# EAGLE board HL78xx-STM32U5 -V3 (EAGLE 9.5.2), part 1 of 2
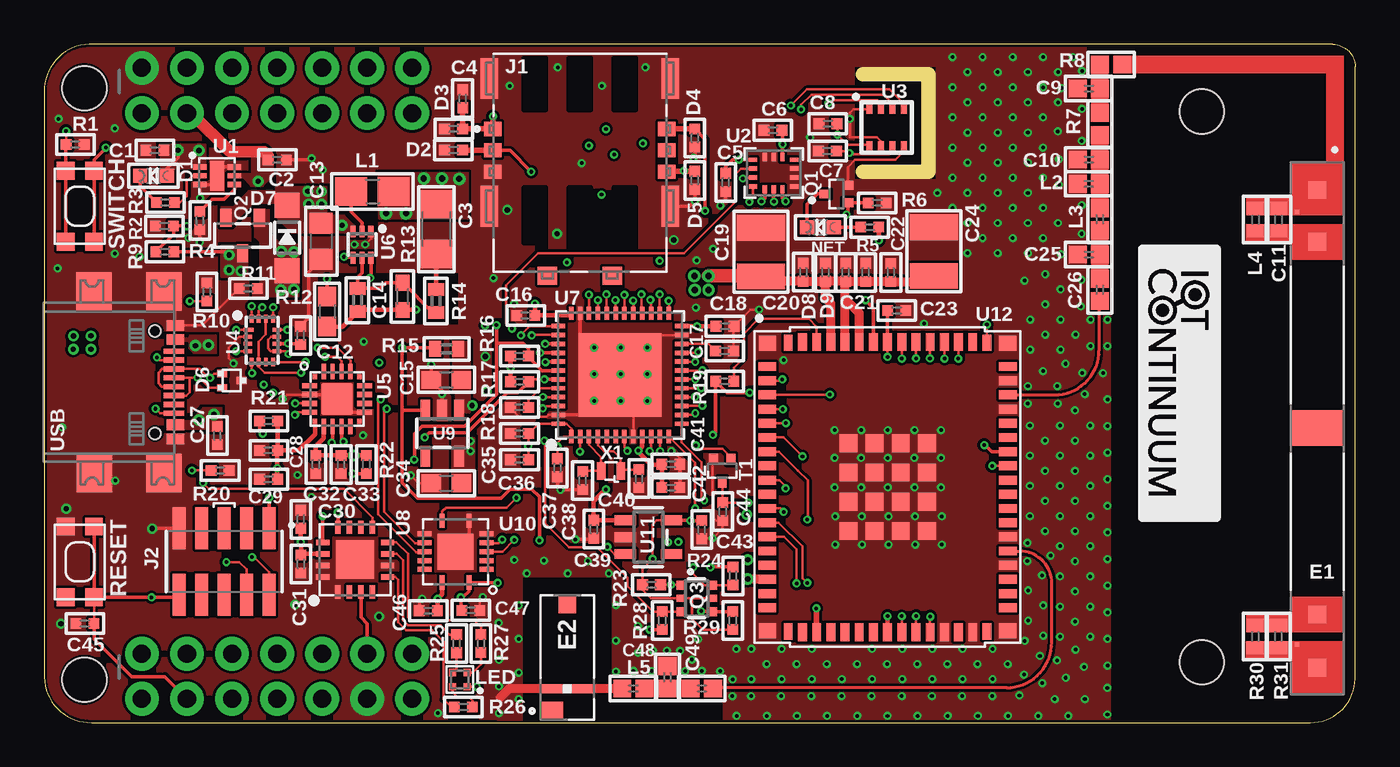
[diagram p0: board, top side]
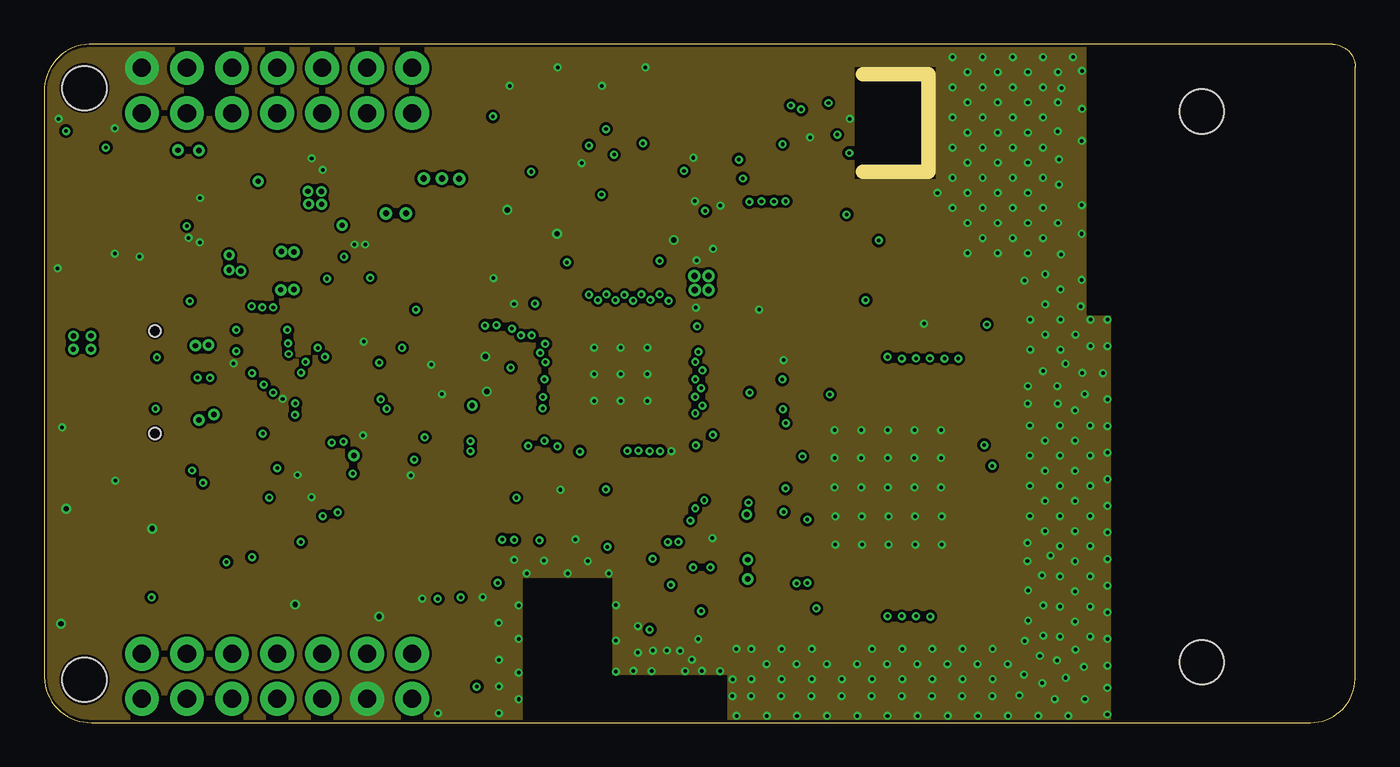
[diagram p1: board, inner layer GND1]
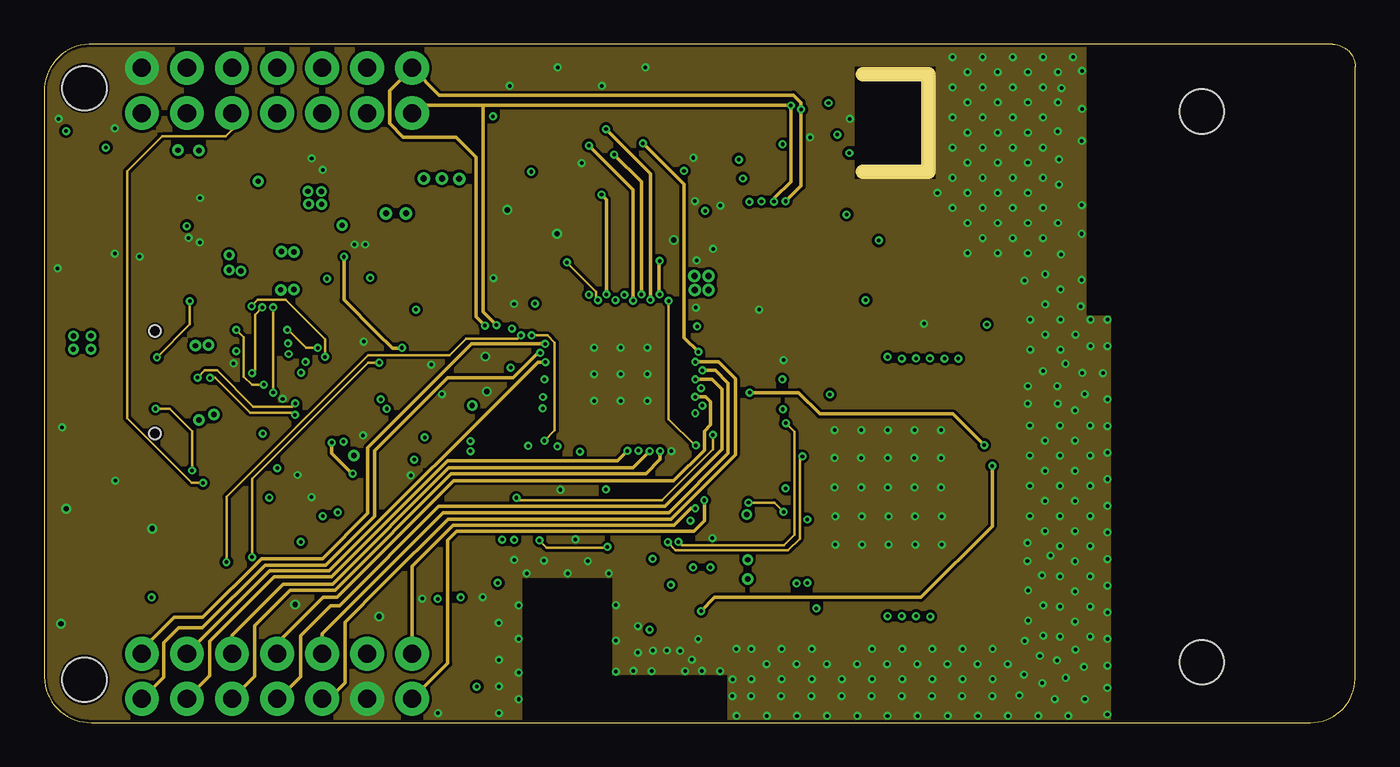
[diagram p2: board, inner layer SIG/GND2]
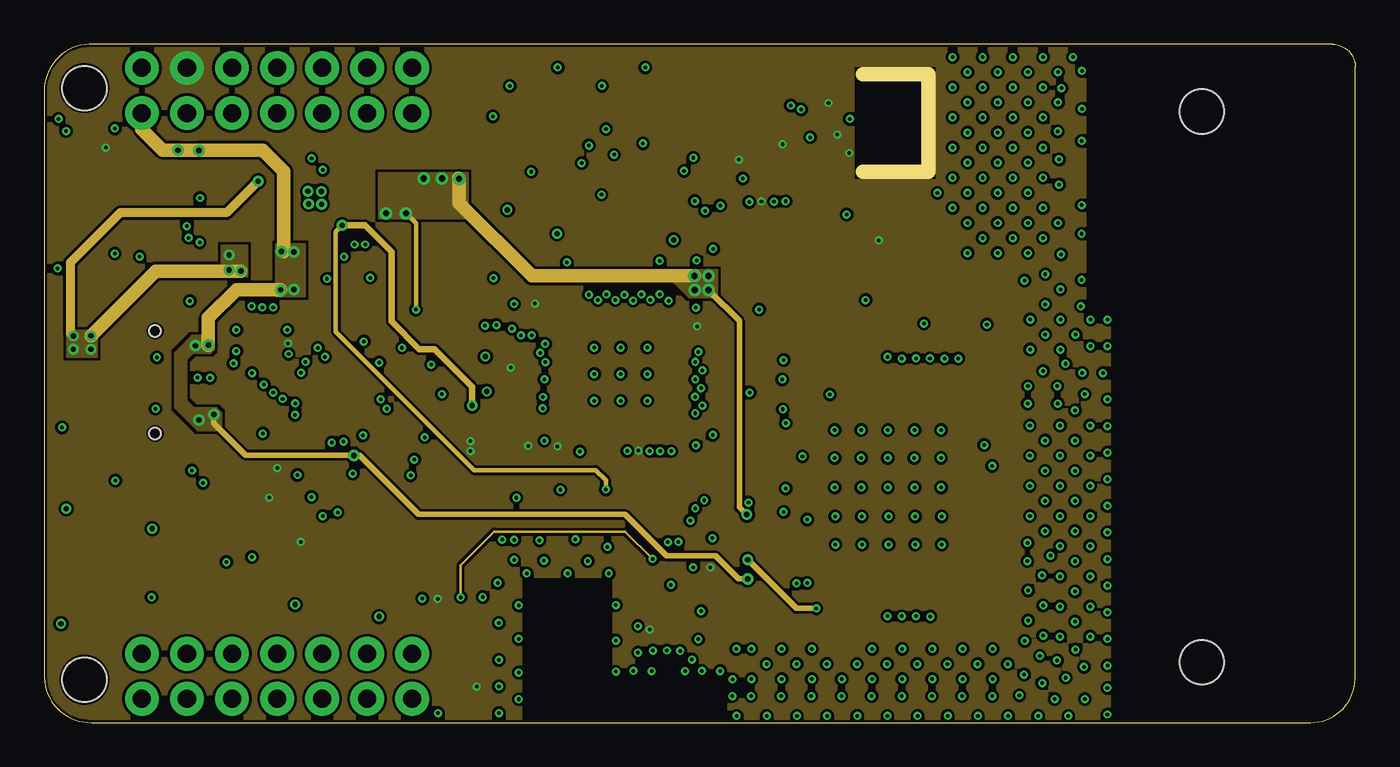
[diagram p3: board, inner layer PWR]
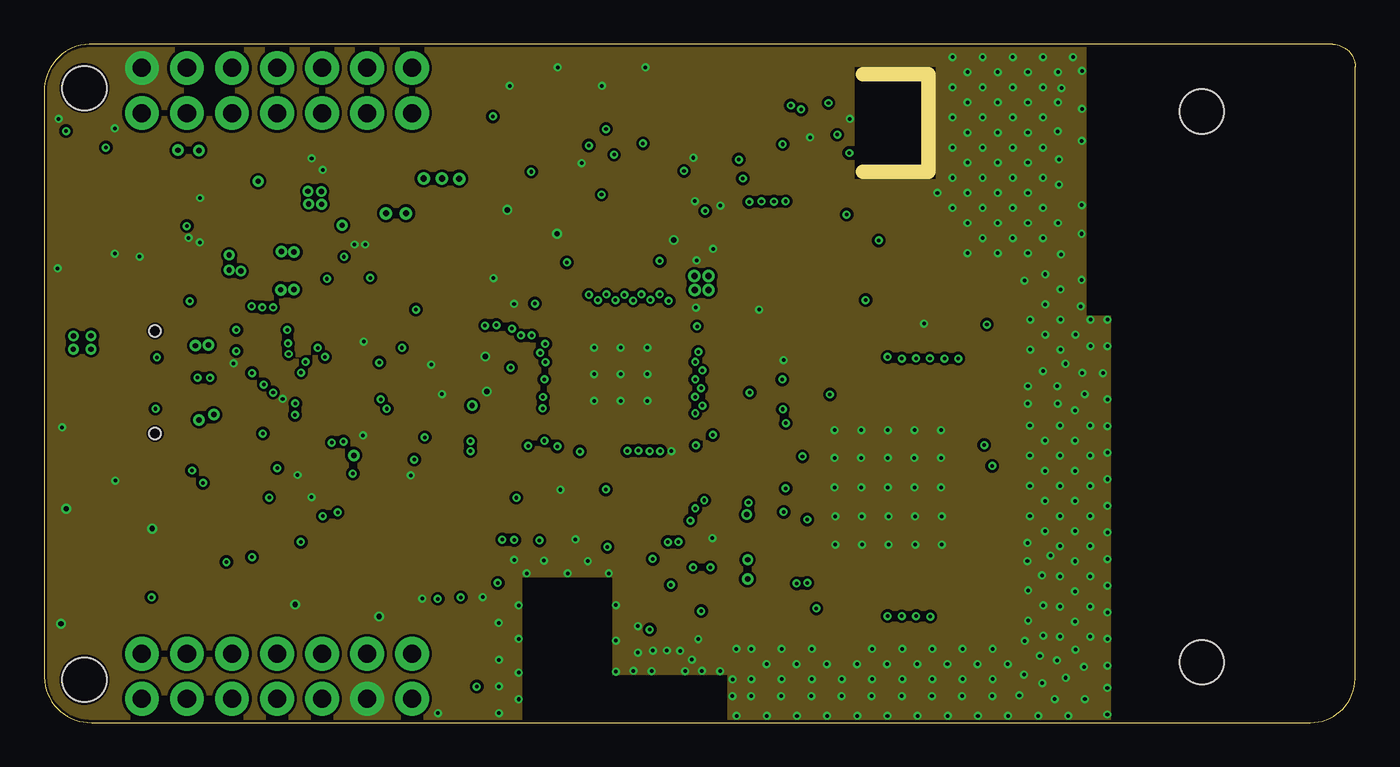
[diagram p4: board, inner layer GND3]
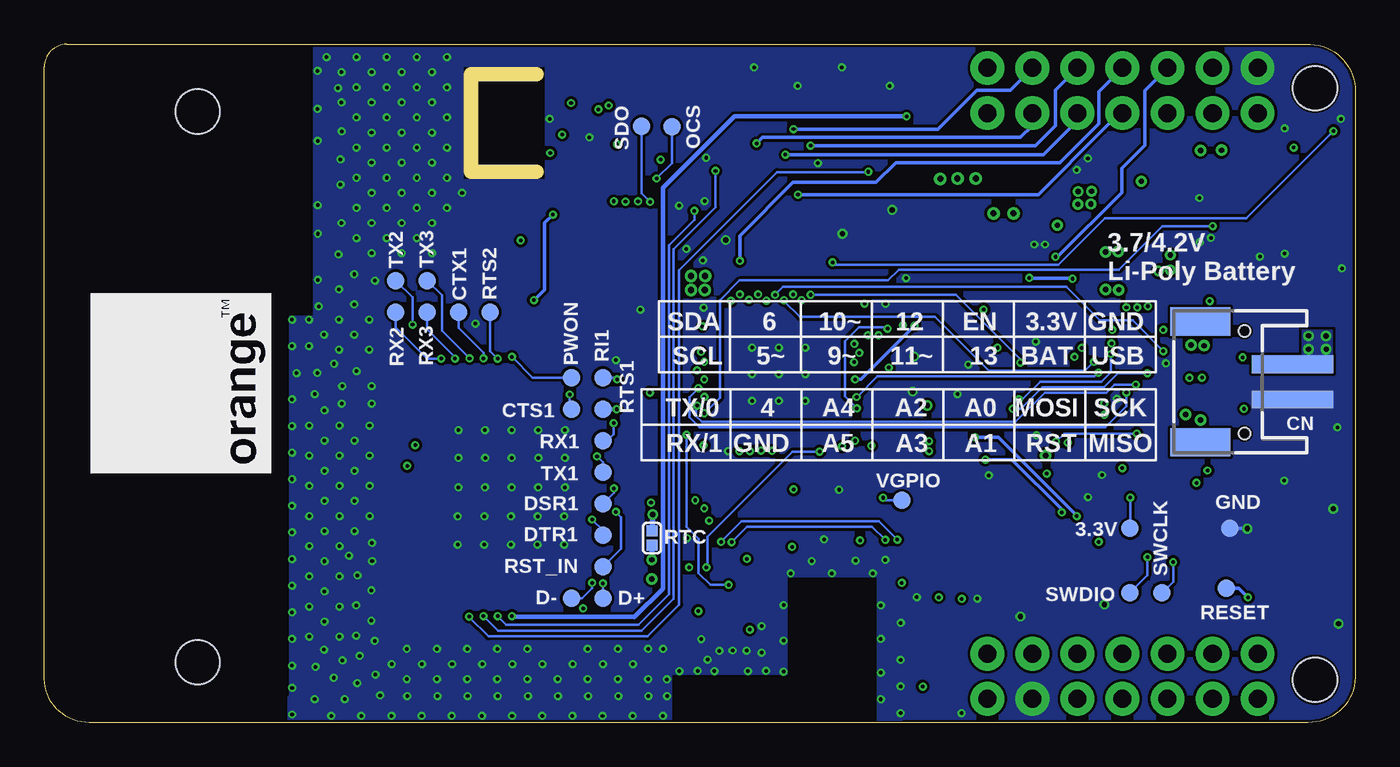
[diagram p5: board, bottom side, seen from below]

Size 73.91 x 38.23 mm. Coordinates in mm from the lower left corner, seen from the top.
Outline: 73.91,36.96 73.91,2.46 arc-90 71.37,0 2.67,0 arc-90 0,2.54 0,35.56 arc-90 2.54,38.23 72.66,38.23
Outline: 72.66,38.23 arc-90 73.91,36.96
Outline: 72.66,38.23 arc-90 73.91,36.96
Copper layers (1+2*3+14*15+16): Top 0.035559375mm / dielectric 0.17018125mm / GND1 0.01778125mm / dielectric 47mil / SIG/GND2 0.0356mm / dielectric 0.2007mm / PWR 0.0356mm / dielectric 0.1499mm / GND3 0.01778125mm / dielectric 0.17018125mm / Bottom 0.035559375mm
Design rules "jlcpcb-6-layer": minimum track width 5mil, minimum drill 0.2mm, track to track 0.126490625mm, track to pad 0.126490625mm, pad to pad 0.126490625mm, via to via 0.126490625mm, smd to smd 0mil, copper to edge 0.1mm, drill to drill 5mil, minimum pad ring 4mil, minimum via ring 4mil, stop-mask expansion 3mil, vias tented up to drill 100mil, thermal gap 10mil
Net classes: 1 highpower: width 0.305 mm, drill 0.483 mm; 2 lowpower: width 0.254 mm, drill 0.483 mm
Holes 2.5 mm at 2.27,2.41 65.27,3.4 2.27,35.76 65.27,34.44
Milling: 3 lines

## Footprints (pad centres in the part's own frame; a part is rotated, then mirrored left to right if it is on the bottom)
TP-1P0 = smd 1 x 1: TP 0,0
KMR2 = smd 1 x 1: 1 2,0.8; 2 2,-0.8; 3 -2,0.8; 4 -2,-0.8
_0402 = smd 0.6 x 0.6: 1 -0.508,0; 2 0.508,0
1206 = smd 1.6 x 1.8: 1 -1.4,0; 2 1.4,0
C_1MMX1MM-IGNION = smd 1 x 1: 1 -0.625,0; 2 0.625,0
C_1MMX0.75MM-IGNION = smd 0.75 x 1: 1 -0.625,0; 2 0.625,0
_0805 = smd 1.2 x 1.3: 1 -1.016,0; 2 1.016,0
0402 = smd 0.7 x 0.9: 1 -0.65,0; 2 0.65,0
0603 = smd 1.1 x 1: 1 -0.85,0; 2 0.85,0
1210-C = smd 2.7 x 1.45: 1 0,1.4; 2 0,-1.35
JSTPH2 = smd 1 x 4.6: 1 -1,-3.7; 2 1,-3.7 | smd 1.6 x 3.4: NC1 -3.4,1.5; NC2 3.4,1.5
CHIPLED_0603 = smd 0.8 x 0.8: A 0,-0.75; C 0,0.75
_0402_ESD = smd 0.6 x 0.6: 1 -0.508,0; 2 0.508,0
SOT723 = smd 0.6 x 0.4: 1 -0.55,0.4; 2 -0.55,-0.4; 3 0.55,0
SOD-123 = smd 1.4 x 1.4: A 1.85,0; C -1.85,0
XDCR_FR01-S4-210 = smd 2 x 3: NC 0,0 | smd 0.254 x 0.254: P1_1 -12.192,-1.143; P2_2 12.192,-1.143 | smd 1 x 1: P1_2 -10.5,0; P2_1 10.5,0; PORT1 -13.424,0; PORT2 13.5,0
XCVR_NN03-320 = smd 1 x 1: 1 -3,0 | smd 0.5 x 1.25: 2 1.75,-0.875; 4 1.75,0.875 | smd 1 x 1.25: 3 3,-0.875
2X7-HEADER = drill 1.016 pad 1.905: 1 0,0; 2 0,-2.54; 3 2.54,0; 4 2.54,-2.54; 5 5.08,0; 6 5.08,-2.54; 7 7.62,0; 8 7.62,-2.54; 9 10.16,0; 10 10.16,-2.54; 11 12.7,0; 12 12.7,-2.54; 13 15.24,0; 14 15.24,-2.54
CONNECTORS_MOLEX_104224-0820 = smd 1 x 2.3: G1 -5.1,1.5; G2 -5.1,8.7; G3 5.1,8.7; G4 5.1,1.5 | smd 1.1 x 1: R1 -1.82,12.625; R2 1.82,12.625 | smd 1 x 0.8: S1 4.9,4.35; S2 4.9,5.55; S3 -4.9,4.35; S4 4.9,6.75; S5 -4.9,5.55; S6 -4.9,6.75
SAMTEC_FTSH-105-XX-X-DV = smd 0.74 x 2.38: 1 -2.54,-1.88; 2 -2.54,1.88; 3 -1.27,-1.88; 4 -1.27,1.88; 5 0,-1.88; 6 0,1.88; 7 1.27,-1.88; 8 1.27,1.88; 9 2.54,-1.88; 10 2.54,1.88
0806-IND = smd 1.8 x 1.6: 1 -1.2,0; 2 1.2,0
L_1MMX1MM-IGNION = smd 1 x 1: 1 -0.625,0; 2 0.625,0
L_1MMX0.75MM-IGNION = smd 0.75 x 1: 1 -0.625,0; 2 0.625,0
LED-WURTH-150044M155260 = smd 0.4 x 0.4: 1 -0.4,-0.4; 2 -0.4,0.4; 3 0.4,0.4; 4 0.4,-0.4
SC-75/SOT-416 = smd 0.5 x 0.6: P1 -0.5,0; P2 0.5,0; P3 0,1.295
SOT23-3 = smd 0.635 x 1.016: 1 -0.95,-1; 2 0.95,-1; 3 0,1
SOT363 = smd 0.5 x 0.5: 1 -0.75,-0.9; 3 0.75,-0.9; 4 0.75,0.9; 6 -0.75,0.9 | smd 0.4 x 0.5: 2 0,-0.9; 5 0,0.9
0402-R = smd 0.6 x 0.6: 1 -0.508,0; 2 0.508,0
R_1MMX1MM-IGNION = smd 1 x 1: 1 -0.625,0; 2 0.625,0
_0603-R = smd 0.9 x 0.8: 1 -0.762,0; 2 0.762,0
R_1MMX0.75MM-IGNION = smd 0.75 x 1: 1 -0.625,0; 2 0.625,0
SMT-JUMPER_2_NC_PASTE_SILK = smd 0.635 x 0.635: 1 -0.406,0; 2 0.406,0
MLPD-UT62X2 = smd 0.75 x 0.3: 1 -0.975,0.5; 2 -0.975,0; 3 -0.975,-0.5; 4 0.975,-0.5; 5 0.975,0; 6 0.975,0.5 | smd 0.8 x 1.7: THERMAL 0,0
LGA-14L = smd 0.475 x 0.25: 1 -1.163,0.75; 2 -1.163,0.25; 3 -1.163,-0.25; 4 -1.163,-0.75; 8 1.163,-0.75; 9 1.163,-0.25; 10 1.163,0.25; 11 1.163,0.75 | smd 0.25 x 0.475: 5 -0.5,-0.912; 6 0,-0.912; 7 0.5,-0.912; 12 0.5,0.912; 13 0,0.912; 14 -0.5,0.912
BME280_LGA = smd 0.5 x 0.35: 1 1.025,0.975; 2 1.025,0.325; 3 1.025,-0.325; 4 1.025,-0.975; 5 -1.025,-0.975; 6 -1.025,-0.325; 7 -1.025,0.325; 8 -1.025,0.975
QFN-16L = smd 0.562 x 0.225: 1 -0.769,0.6 | smd 0.463 x 0.225: 2 -0.819,0.2; 3 -0.819,-0.2; 4 -0.819,-0.6; 9 0.819,-0.6; 10 0.819,-0.2; 11 0.819,0.2; 12 0.819,0.6 | smd 0.225 x 0.463: 5 -0.6,-1.218; 6 -0.2,-1.218; 7 0.2,-1.218; 8 0.6,-1.218; 13 0.6,1.218; 14 0.2,1.218; 15 -0.2,1.218; 16 -0.6,1.218
QFN20 = smd 0.3 x 0.3: 1 -1.25,1.25; 6 -1.25,-1.25; 11 1.25,-1.25; 16 1.25,1.25 | smd 0.9 x 0.3: 2 -1.55,0.75; 3 -1.55,0.25; 4 -1.55,-0.25; 5 -1.55,-0.75; 12 1.55,-0.75; 13 1.55,-0.25; 14 1.55,0.25; 15 1.55,0.75 | smd 0.3 x 0.9: 7 -0.75,-1.55; 8 -0.25,-1.55; 9 0.25,-1.55; 10 0.75,-1.55; 17 0.75,1.55; 18 0.25,1.55; 19 -0.25,1.55; 20 -0.75,1.55 | smd 1.8 x 1.8: TP 0,0
SOT-563 = smd 0.67 x 0.3: 1 -0.74,0.5; 2 -0.74,0; 3 -0.74,-0.5; 4 0.74,-0.5; 5 0.74,0; 6 0.74,0.5
TQFN48_7MM = smd 0.25 x 0.75: 1 -2.75,-3.475; 2 -2.25,-3.475; 3 -1.75,-3.475; 4 -1.25,-3.475; 5 -0.75,-3.475; 6 -0.25,-3.475; 7 0.25,-3.475; 8 0.75,-3.475; 9 1.25,-3.475; 10 1.75,-3.475; 11 2.25,-3.475; 12 2.75,-3.475; 25 2.75,3.475; 26 2.25,3.475; 27 1.75,3.475; 28 1.25,3.475; 29 0.75,3.475; 30 0.25,3.475; 31 -0.25,3.475; 32 -0.75,3.475; 33 -1.25,3.475; 34 -1.75,3.475; 35 -2.25,3.475; 36 -2.75,3.475 | smd 0.75 x 0.25: 13 3.475,-2.75; 14 3.475,-2.25; 15 3.475,-1.75; 16 3.475,-1.25; 17 3.475,-0.75; 18 3.475,-0.25; 19 3.475,0.25; 20 3.475,0.75; 21 3.475,1.25; 22 3.475,1.75; 23 3.475,2.25; 24 3.475,2.75; 37 -3.475,2.75; 38 -3.475,2.25; 39 -3.475,1.75; 40 -3.475,1.25; 41 -3.475,0.75; 42 -3.475,0.25; 43 -3.475,-0.25; 44 -3.475,-0.75; 45 -3.475,-1.25; 46 -3.475,-1.75; 47 -3.475,-2.25; 48 -3.475,-2.75 | smd 4.7 x 4.7: THERMAL 0,0
QFN16-4X4MM = smd 0.75 x 0.305: 1 -1.825,0.975; 2 -1.825,0.325; 3 -1.825,-0.325; 4 -1.825,-0.975; 9 1.825,-0.975; 10 1.825,-0.325; 11 1.825,0.325; 12 1.825,0.975 | smd 0.305 x 0.75: 5 -0.975,-1.825; 6 -0.325,-1.825; 7 0.325,-1.825; 8 0.975,-1.825; 13 0.975,1.825; 14 0.325,1.825; 15 -0.325,1.825; 16 -0.975,1.825 | smd 2.16 x 2.16: T 0,0
SOT23-5@1 = smd 0.55 x 1.2: 1 -0.95,-1.3; 2 0,-1.3; 3 0.95,-1.3; 4 0.95,1.3; 5 -0.95,1.3
PVQFN-N14 = smd 0.28 x 0.8: 1 -0.75,1.74; 7 -0.75,-1.74; 8 0.75,-1.74; 14 0.75,1.74 | smd 0.8 x 0.28: 2 -1.75,1; 3 -1.75,0.5; 4 -1.75,0; 5 -1.75,-0.5; 6 -1.75,-1; 9 1.75,-1; 10 1.75,-0.5; 11 1.75,0; 12 1.75,0.5; 13 1.75,1 | smd 2.05 x 2.05: GND 0,0
SOT23-5 = smd 1.2 x 0.55: 1 -1.3,0.95; 2 -1.3,0; 3 -1.3,-0.95; 4 1.3,-0.95; 5 1.3,0.95
HL781X = smd 0.5 x 1: C1 -6.8,-6.78; C2 -6,-6.78; C3 -5.2,-6.78; C4 -4.4,-6.78; C5 -3.6,-6.78; C6 -2.8,-6.78; C7 -2,-6.78; C8 -1.2,-6.78; C9 -0.4,-6.78; C10 0.4,-6.78; C11 1.2,-6.78; C12 2,-6.78; C13 2.8,-6.78; C14 3.6,-6.78; C15 4.4,-6.78; C16 5.2,-6.78; C17 6,-6.78; C18 6.8,-6.78; C34 6.8,6.78; C35 6,6.78; C36 5.2,6.78; C37 4.4,6.78; C38 3.6,6.78; C39 2.8,6.78; C40 2,6.78; C41 1.2,6.78; C42 0.4,6.78; C43 -0.4,6.78; C44 -1.2,6.78; C45 -2,6.78; C46 -2.8,6.78; C47 -3.6,6.78; C48 -4.4,6.78; C49 -5.2,6.78; C50 -6,6.78; C51 -6.8,6.78 | smd 0.92 x 0.5: C19 8.14,-5.6; C33 8.14,5.6; C52 -8.14,5.6; C66 -8.14,-5.6 | smd 1 x 0.5: C20 8.18,-4.8; C21 8.18,-4; C22 8.18,-3.2; C23 8.18,-2.4; C24 8.18,-1.6; C25 8.18,-0.8; C26 8.18,0; C27 8.18,0.8; C28 8.18,1.6; C29 8.18,2.4; C30 8.18,3.2; C31 8.18,4; C32 8.18,4.8; C53 -8.18,4.8; C54 -8.18,4; C55 -8.18,3.2; C56 -8.18,2.4; C57 -8.18,1.6; C58 -8.18,0.8; C59 -8.18,0; C60 -8.18,-0.8; C61 -8.18,-1.6; C62 -8.18,-2.4; C63 -8.18,-3.2; C64 -8.18,-4; C65 -8.18,-4.8 | smd 0.85 x 0.97: CG1 -8.105,-6.765; CG2 8.105,-6.765; CG3 8.105,6.765; CG4 -8.105,6.765 | smd 1 x 1: G1 -2.475,-2.212; G2 -0.825,-2.212; G3 0.825,-2.212; G4 2.475,-2.212; G5 -2.475,-0.738; G6 -0.825,-0.738; G7 0.825,-0.738; G8 2.475,-0.738; G9 -2.475,0.738; G10 -0.825,0.738; G11 0.825,0.738; G12 2.475,0.738; G13 -2.475,2.212; G14 -0.825,2.212; G15 0.825,2.212; G16 2.475,2.212
USB4105-CGT = smd 0.6 x 1: A1B12 -3.2,0.075; A4B9 -2.4,0.075; B1A12 3.2,0.075; B4A9 2.4,0.075 | smd 0.3 x 1.15: A5 -1.25,0; A6 -0.25,0; A7 0.25,0; A8 1.25,0; B5 1.75,0; B6 0.75,0; B7 -0.75,0; B8 -1.75,0 | smd 2.18 x 2: N0 -5.11,-0.575; N1 -5.11,-4.505; N2 5.11,-4.502; N3 5.11,-0.575 | hole 0.65: -2.89,-1.075; 2.89,-1.075
ABS05 = smd 0.5 x 1: A -0.55,0; B 0.55,0

## Placement (x,y rotation side)
3.3V  TP-1SIDE-1P0  [TP-1P0]  12.7,10.95 90 bottom
BOOTLOADER  SPST_TACT-KMR2  [KMR2]  2,29.1 270 top
C1  2.2uF  [_0402]  6.23,32.26 0 top
C2  2.2uF  [_0402]  13.13,31.72 180 top
C3  10uF  [1206]  22.1,27.81 270 top
C4  100nF  [_0402]  23.59,35.16 90 top
C5  1uF  [_0402]  38.42,30.45 90 top
C6  100nF  [_0402]  41.08,33.38 0 top
C7  100nF  [_0402]  44.16,32.22 0 top
C8  100nF  [_0402]  44.18,33.75 0 top
C9  0.6pF  [C_1MMX1MM-IGNION]  58.9,35.73 0 top
C10  2.1pF  [C_1MMX1MM-IGNION]  58.9,31.73 0 top
C11  0.4pF  [C_1MMX0.75MM-IGNION]  69.6,28.35 90 top
C12  100nF  [_0402]  14.45,21.82 90 top
C13  15uF  [_0805]  15.61,27.13 270 top
C14  120pF  [0402]  17.66,23.81 270 top
C15  10uF  [0603]  22.67,19.31 0 top
C16  100nF  [_0402]  27.15,22.94 180 top
C17  4.7uF  [_0402]  38.35,20.94 0 top
C18  100nF  [_0402]  38.38,22.33 0 top
C19  150uF  [1210-C]  40.41,26.54 180 top
C20  100nF  [_0402]  42.8,25.38 90 top
C21  10pF  [_0402]  46.31,25.38 90 top
C22  33pF  [_0402]  47.73,25.36 90 top
C23  33pF  [_0402]  48.06,23.22 0 top
C24  150uF  [1210-C]  50.16,26.57 180 top
C25  1pF  [C_1MMX1MM-IGNION]  58.9,26.38 0 top
C26  1.7pF  [C_1MMX1MM-IGNION]  59.52,24.39 270 top
C27  1uF  [_0402]  9.75,16.17 90 top
C28  100nF  [_0402]  12.65,15.34 180 top
C29  4.7uF  [_0402]  12.65,13.72 180 top
C30  10uF  [_0402]  14.46,11.46 90 top
C31  100nF  [_0402]  14.47,8.94 270 top
C32  4.7uF  [_0402]  15.32,14.55 270 top
C33  100nF  [_0402]  16.74,14.55 270 top
C34  10uF  [0603]  22.67,13.49 0 top
C35  100nF  [_0402]  26.8,16.29 180 top
C36  10uF  [_0402]  26.8,14.82 180 top
C37  1uF  [_0402]  28.93,14.36 270 top
C38  12pF  [_0402]  30.35,13.65 270 top
C39  100nF  [_0402]  30.98,10.9 270 top
C40  12pF  [_0402]  33.53,13.75 270 top
C41  100nF  [_0402]  35.33,14.56 0 top
C42  1uF  [_0402]  35.33,13.24 0 top
C43  100nF  [_0402]  37.06,10.87 270 top
C44  33pF  [_0402]  38.25,11.9 270 top
C45  100nF  [_0402]  2.3,5.58 180 top
C46  100nF  [_0402]  21.66,6.3 180 top
C47  100nF  [_0402]  24.04,6.32 180 top
C48  0.1pF  [C_1MMX1MM-IGNION]  35.13,2.55 90 top
C49  0.3pF  [C_1MMX1MM-IGNION]  37.08,1.92 180 top
CN  S2B-PH-SM4-TB(LF)(SN)  [JSTPH2]  7.23,19.2 90 bottom
CTS1  TP-1SIDE-1P0  [TP-1P0]  44.2,17.66 0 bottom
CTX1  TP-1SIDE-1P0  [TP-1P0]  50.55,23.14 0 bottom
D1  ORANGE  [CHIPLED_0603]  6.16,30.82 90 top
D2  CGA0402MLC-05G  [_0402_ESD]  23.07,32.27 0 top
D3  CGA0402MLC-05G  [_0402_ESD]  23.08,33.46 0 top
D4  CGA0402MLC-05G  [_0402_ESD]  36.68,32.95 90 top
D5  CGA0402MLC-05G  [_0402_ESD]  36.68,30.56 90 top
D6  D_ESD5V3U2U-03F  [SOT723]  10.57,19.27 0 top
D7  [SOD-123]  13.69,27.31 270 top
D8  CGA0402MLC-05G  [_0402_ESD]  44.04,25.38 270 top
D9  CGA0402MLC-05G  [_0402_ESD]  45.18,25.38 270 top
D+  TP-1SIDE-1P0  [TP-1P0]  42.42,6.99 0 bottom
D-  TP-1SIDE-1P0  [TP-1P0]  44.2,6.99 0 bottom
DSR1  TP-1SIDE-1P0  [TP-1P0]  42.42,12.33 0 bottom
DTR1  TP-1SIDE-1P0  [TP-1P0]  42.42,10.55 0 bottom
E1  ANTENNA-FR01-S4-210  [XDCR_FR01-S4-210]  71.78,16.59 270 top
E2  NN03-320  [XCVR_NN03-320]  29.49,3.66 270 top
GND  TP-1SIDE-1P0  [TP-1P0]  7.08,10.95 180 bottom
H1  HEADER2X7  [2X7-HEADER]  5.5,36.89 0 top
H2  HEADER2X7  [2X7-HEADER]  5.5,3.88 0 top
J1  CONNECTORS_CON-SIM-104224-0820  [CONNECTORS_MOLEX_104224-0820]  30.19,37.8 180 top
J2  CON-FTSH-105-XX-X-DV  [SAMTEC_FTSH-105-XX-X-DV]  10.14,9.08 180 top
L1  1uH (DFE201610E-1R0M=P2)  [0806-IND]  18.51,29.94 0 top
L2  3.6nH  [L_1MMX1MM-IGNION]  58.9,30.36 180 top
L3  3.7nH  [L_1MMX1MM-IGNION]  59.52,28.37 90 top
L4  10nH  [L_1MMX0.75MM-IGNION]  68.3,28.35 270 top
L5  1.5nH  [L_1MMX1MM-IGNION]  33.21,1.92 0 top
LED  [LED-WURTH-150044M155260]  23.43,2.42 90 top
NET  BLUE  [CHIPLED_0603]  43.76,27.92 90 top
OCS  TP-1SIDE-1P0  [TP-1P0]  38.53,33.59 0 bottom
PWON  TP-1SIDE-1P0  [TP-1P0]  44.2,19.44 0 bottom
Q1  NTA7002NT1G  [SC-75/SOT-416]  45.32,29.79 90 top
Q2  SI2101A-TP  [SOT23-3]  11.18,27.45 180 top
Q3  2N7002DW-TP  [SOT363]  36.78,6.99 270 top
R1  100K  [0402-R]  1.74,32.58 180 top
R2  100K  [0402-R]  6.77,27.98 180 top
R3  1K  [0402-R]  6.82,29.32 0 top
R4  5.1K  [0402-R]  8.77,28.29 90 top
R5  1K  [0402-R]  46.55,27.92 180 top
R6  470K  [0402-R]  46.97,29.29 0 top
R7  0R  [R_1MMX1MM-IGNION]  59.52,33.74 270 top
R8  0R  [R_1MMX1MM-IGNION]  60.15,37.09 180 top
R9  100K  [0402-R]  6.8,26.54 180 top
R10  5.1K  [0402-R]  9.17,24.26 90 top
R11  470K  [0402-R]  11.51,24.47 0 top
R12  499K  [0603]  15.94,23.17 270 top
R13  523K  [_0603-R]  20.2,24.02 270 top
R14  100K  [0402]  22.08,23.76 270 top
R15  100K  [0402]  22.68,21.06 180 top
R16  10K  [0402-R]  26.8,20.66 180 top
R17  10K  [0402-R]  26.8,19.21 180 top
R18  10K  [0402-R]  26.8,17.76 0 top
R19  1K  [0402-R]  38.37,19.24 180 top
R20  5.1K  [0402-R]  9.91,14.21 0 top
R21  1K  [0402-R]  12.65,16.99 0 top
R22  2K2  [0402-R]  18.16,14.55 90 top
R23  4.7K  [0402-R]  34.24,7.76 180 top
R24  4.7K  [0402-R]  38.83,8.27 90 top
R25  1K  [0402-R]  23.25,4.45 90 top
R26  1K  [0402-R]  23.63,0.88 180 top
R27  1K  [0402-R]  24.62,4.45 90 top
R28  4.7K  [0402-R]  34.84,5.74 270 top
R29  4.7K  [0402-R]  38.81,5.74 270 top
R30  0R  [R_1MMX0.75MM-IGNION]  68.29,4.84 270 top
R31  0R  [R_1MMX0.75MM-IGNION]  69.58,4.85 270 top
RESET  TP-1SIDE-1P0  [TP-1P0]  7.27,7.58 180 bottom
RI1  TP-1SIDE-1P0  [TP-1P0]  42.42,19.44 0 bottom
RST  SPST_TACT-KMR2  [KMR2]  2,9.05 270 top
RST_IN  TP-1SIDE-1P0  [TP-1P0]  42.42,8.77 0 bottom
RTC  [SMT-JUMPER_2_NC_PASTE_SILK]  39.65,10.4 270 bottom
RTS1  TP-1SIDE-1P0  [TP-1P0]  42.42,17.66 0 bottom
RTS2  TP-1SIDE-1P0  [TP-1P0]  48.77,23.14 0 bottom
RX1  TP-1SIDE-1P0  [TP-1P0]  42.42,15.88 0 bottom
RX2  TP-1SIDE-1P0  [TP-1P0]  54.1,23.14 0 bottom
RX3  TP-1SIDE-1P0  [TP-1P0]  52.32,23.14 0 bottom
SDO  TP-1SIDE-1P0  [TP-1P0]  40.23,33.61 0 bottom
SWCLK  TP-1SIDE-1P0  [TP-1P0]  10.89,7.33 90 bottom
SWDIO  TP-1SIDE-1P0  [TP-1P0]  12.7,7.33 0 bottom
T1  DTC114YE  [SC-75/SOT-416]  38.23,14.84 180 top
TX1  TP-1SIDE-1P0  [TP-1P0]  42.42,14.11 0 bottom
TX2  TP-1SIDE-1P0  [TP-1P0]  54.1,24.91 0 bottom
TX3  TP-1SIDE-1P0  [TP-1P0]  52.32,24.91 0 bottom
U1  SC810  [MLPD-UT62X2]  9.75,30.82 0 top
U2  LSM6DSOX  [LGA-14L]  41.12,30.97 180 top
U3  BME280  [BME280_LGA]  47.5,33.54 90 top
U4  DG2525  [QFN-16L]  12.29,21.54 0 top
U5  CP2102N-20  [QFN20]  16.51,18.24 0 top
U6  TPS62A02A  [SOT-563]  17.92,26.94 270 top
U7  STM32U585-QFN48  [TQFN48_7MM]  32.46,19.59 0 top
U8  PCA9534-PCA9534ARGVR  [QFN16-4X4MM]  17.53,9.18 90 top
U9  AP2112K-3.3  [SOT23-5@1]  22.43,16.31 180 top
U10  [PVQFN-N14]  23.19,9.63 180 top
U11  S1318  [SOT23-5]  34.06,10.44 0 top
U12  HL7812  [HL781X]  47.55,13.27 270 top
USB  [USB4105-CGT]  7.32,19.18 270 top
VGPIO  TP-1SIDE-1P0  [TP-1P0]  25.56,12.52 0 bottom
X1  ABS05-32.768KHZ-T  [ABS05]  31.95,14.18 180 top

## Library data of the parts
3.3V BOOTLOADER C1-C49 CN CTS1 CTX1 D1-D5 D7-D9 D+ D- DSR1 DTR1 GND H1 H2 L1-L5 LED NET OCS PWON Q1-Q3 R1-R31 RESET RI1 RST RST_IN RTS1 RTS2 RX1-RX3 SDO SWCLK SWDIO T1 TX1-TX3 U1 U2 U4 U6-U11 USB VGPIO = tobias
D6 = tobias; DIGIKEY: ESD5V3U2U-03F H6327DKR-ND
E1 = tobias; DESCRIPTION: 700MHz, 800MHz, 850MHz, 900MHz, 1.7GHz, 1.8GHz, 1.9GHz, 2GHz, 2.1GHz, 2.3GHz, 2.5GHz, 2.6GHz, 1.561GHz, 1.575GHz, 1.606GHz, 2.45GHz, 3.5GHz, 3.7GHz, 3.8GHz 5G, DCS, GNSS, GSM, LTE, PCS, UMTS Chip RF Antenna 698MHz ~ 3.8GHz 2.4dBi Solder Surface Mount; MF: Ignion; MP: FR01-S4-210; PACKAGE: None
E2 = tobias; DESCRIPTION: Dual port antenna booster for GNSS, Bluetooth, 5G and UWB (1561 - 1606MHz, 2400 - 2500MHz, 3400 - 3800MHz, 3100 - 4800MHz and 6000 - 10600 MHz), signal booster; DIGI-KEY_PART_NUMBER: 2115-NN03-320TR-ND; MF: Ignion; MP: NN03-320; PACKAGE: None; PURCHASE-URL: https://pricing.snapeda.com/search/part/NN03-320/?ref=eda
J1 = tobias; DESC: NANOSIM SOCKET 1.11H P/PULL TYPE; DESCRIPTION: 6 Position Card Connector NANO SIM Surface Mount, Right Angle Gold; MF: Molex; MPN: 104224-0820; PACKAGE: None; PRICE: None; PROD_ID: CONN-15682
J2 = tobias; DESCRIPTION: Connector Header Surface Mount 10 position 0.050 (1.27mm); DIGIKEYPN: SAM8796-ND; MF: Samtec; MPN: FTSH-105-01-F-DV-K; PRICE: None; PROD_ID: CONN-15353; PURCHASE-URL: https://pricing.snapeda.com/search/part/FTSH-105-01-F-DV-K/?ref=eda
RTC = SparkFun-Jumpers
U3 = tobias; PROD_ID: IC-13090
U5 = Thread-USB-Key
U12 = Cellular
X1 = tobias; DIGIKEY: 535-11897-1-ND

## Nets
1.8V_EXT: C43.1 C47.2 Q3.2 Q3.5 R23.2 R29.2 U10.1 U11.5
3.3V: 3.3V.TP BOOTLOADER.1 BOOTLOADER.3 C5.2 C6.2 C7.2 C8.2 C12.1 C16.1 C18.1 C28.1 C29.1 C30.1 C31.1 C34.2 C35.1 C36.1 C37.1 C41.1 C42.1 C46.1 H1.3 J2.1 LED.1 R5.1 R16.2 R17.2 R21.2 R24.2 R28.2 U2.5 U2.8 U2.12 U3.2 U3.6 U3.8 U4.10 U5.6 U7.1 U7.9 U7.24 U7.36 U7.48 U8.14 U9.5 U10.14
!POWER_ON_N: C23.1 PWON.TP U12.C59
!RESET: C45.1 H2.4 J2.10 RESET.TP RST.1 RST.3 U7.7
!RST_HL7812: C44.1 RST_IN.TP T1.P3 U12.C11
A0: H2.5 U7.10
A1: H2.6 U7.11
A2: H2.7 U7.16
A3: H2.8 U7.18
A4: H2.9 U7.19
A5: H2.10 U7.20
AN: E2.4 L5.1
BAT_LEVEL: R2.1 R9.2 U7.14
BLUE: R27.2 U8.8
BOOT: R18.2 U7.44
BUTTON: BOOTLOADER.2 BOOTLOADER.4 R1.2 U7.33
CC1: R10.1 USB.A5
CC2: R20.1 USB.B5
CP2102_RX: U4.12 U5.17
CP2102_TX: U4.16 U5.18
CTS_HL7812: CTS1.TP U12.C3
D4: H2.11 U8.3
D5: H1.12 U7.21
D6: H1.11 U7.27
D9: H1.10 U7.28
D10: H1.9 U7.29
D11: H1.8 U7.32
D12: H1.7 U7.26
D13: H1.6 U8.9
D+: D6.2 U5.4 USB.A6 USB.B6
D-: D6.1 U5.5 USB.A7 USB.B7
EN: H1.5 R15.2 U6.4 U9.3 U11.3
GND: C1.1 C2.1 C3.2 C4.2 C5.1 C6.1 C7.1 C8.1 C9.1 C10.1 C12.2 C13.2 C15.1 C16.2 C17.2 C18.2 C19.2 C20.2 C21.2 C22.2 C23.2 C24.2 C25.1 C27.1 C28.2 C29.2 C30.2 C31.2 C32.2 C33.2 C34.1 C35.2 C36.2 C37.2 C38.2 C39.2 C40.2 C41.2 C42.2 C43.2 C44.2 C45.2 C46.2 C47.1 C48.2 CN.1 D2.1 D3.1 D4.1 D5.1 D6.3 D8.1 D9.1 E2.2 GND.TP H1.1 H2.12 J1.G1 J1.G2 J1.G3 J1.G4 J1.S4 J2.9 L2.2 Q1.P2 R1.1 R2.2 R4.1 R6.2 R10.2 R11.1 R14.1 R18.1 R20.2 RST.4 T1.P2 U1.3 U1.6 U1.THERMAL U2.1 U2.2 U2.3 U2.6 U2.7 U3.1 U3.5 U3.7 U4.2 U5.3 U5.12 U5.TP U6.1 U7.8 U7.23 U7.35 U7.47 U7.THERMAL U8.1 U8.6 U8.15 U8.16 U8.T U9.2 U10.6 U10.7 U10.9 U10.GND U11.2 U12.C30 U12.C32 U12.C37 U12.C39 U12.C48 U12.C50 U12.CG1 U12.CG2 U12.CG3 U12.CG4 U12.G1 U12.G2 U12.G3 U12.G4 U12.G5 U12.G6 U12.G7 U12.G8 U12.G9 U12.G10 U12.G11 U12.G12 U12.G13 U12.G14 U12.G15 U12.G16 USB.A1B12 USB.B1A12 USB.N0 USB.N1 USB.N2 USB.N3
GREEN: R25.2 U8.7
HL7812_SHIFT_RX: U4.5 U4.15 U10.10
HL7812_SHIFT_TX: U4.9 U4.11 U10.11
HL_D+: D-.TP U12.C12
HL_D-: D+.TP U12.C13
INT2_ACCEL: U2.9 U7.46
MISO: H2.2 U7.40
MODULE_RX: U4.8 U7.31
MODULE_TX: U4.4 U7.30
MOSI: H2.3 U7.41
N$1: D1.C R3.1
N$3: C14.1 R13.1 R14.2 U6.5
N$4: C17.1 U7.22
N$5: R12.1 U6.6
N$7: NET.C Q1.P3
N$8: L1.1 U6.2
N$9: NET.A R5.2
N$12: RX2.TP U12.C54
N$14: TX2.TP U12.C52
N$15: RX3.TP U12.C55
N$16: TX3.TP U12.C56
N$17: CTX1.TP U12.C57
N$18: RTS2.TP U12.C58
N$19: LED.4 R27.1
N$20: C48.1 C49.2 L5.2
N$21: E1.PORT1 R8.1
N$22: C10.2 L2.1 L3.2 R7.2
N$23: C9.2 R7.1 R8.2
N$24: C25.2 C26.1 L3.1
N$25: C11.2 E1.P1_1 L4.1
N$26: C11.1 E1.P1_2 L4.2
N$27: LED.3 R25.1
N$28: R22.1 U5.8
N$29: E1.P2_1 R30.1 R31.1
N$30: LED.2 R26.1
N$31: E1.P2_2 R30.2 R31.2
N$32: RI1.TP U12.C2
N$33: DTR1.TP U12.C7
N$34: DSR1.TP U12.C9
N$37: RTC.2 U12.C21
N$48: R3.2 U1.2
N$51: R4.2 U1.4
NC: U5.10
NETLIGHT: Q1.P1 R6.1 U12.C60
OCS_AUX: OCS.TP U2.10
OSC32K_IN: C38.1 U7.3 X1.B
OSC32K_OUT: C40.1 U7.4 X1.A
RED: R26.2 U8.5
RESET: R21.1 U5.9
RF_GNSS: C49.1 U12.C38
RF_LTE-M: C26.2 U12.C49
RST_MODULE: T1.P1 U7.25
RTS_HL7812: RTS1.TP U12.C4
RX/D1: H2.14 U7.13
RX_HL7812: RX1.TP U10.5 U12.C5
SCK: H2.1 U7.39
SCL: H1.14 R16.1 U2.13 U3.4 U7.42 U8.12
SDA: H1.13 R17.1 U2.14 U3.3 U7.43 U8.13
SDO_AUX: SDO.TP U2.11
SEL12-34: U4.6 U4.14 U7.45
SIM_CLK: D4.2 J1.S3 U12.C27
SIM_DATA: D5.2 J1.S6 U12.C28
SIM_RST: D2.2 J1.S2 U12.C29
SIM_VCC: C4.1 D3.2 J1.S1 U12.C26
SWCLK: J2.4 SWCLK.TP U7.37
SWDIO: J2.2 SWDIO.TP U7.34
TX/D0: H2.13 U7.12
TX_HL7812: TX1.TP U10.4 U12.C6
UIM1_DET: R19.1 U12.C64
USB_UART_RX: U4.1 U7.15
USB_UART_TX: U4.13 U7.17
VBAT: C2.2 CN.2 H1.4 Q2.3 R9.1 U1.5
VBUS: C1.2 C27.2 C32.1 C33.1 D1.A D7.A H1.2 Q2.1 R11.2 R22.2 U1.1 U5.7 U12.C16 USB.A4B9 USB.B4A9
VGPIO: Q3.1 R19.2 R23.1 U10.8 U12.C45 VGPIO.TP
VGPIO_SHIFT: Q3.6 R24.1 U7.2
VIN: C13.1 C15.2 C39.1 D7.C Q2.2 R15.1 U6.3 U9.1 U11.1
VIN_3.7V: C3.1 C14.2 C19.1 C20.1 C21.1 C22.1 C24.1 D8.2 D9.2 L1.2 R12.2 R13.2 RTC.1 U12.C61 U12.C62 U12.C63
VPP: J1.S5
WAKEUP: Q3.4 R29.1 U12.C44
WAKEUP_SHIFT: Q3.3 R28.1 U7.38